# Altium PCB PCB1.PcbDoc (part 2 of 3)
Units mil, origin at the board's own origin, x right, y up, seen from the top; angles counter-clockwise.
Board outline 3937.01 x 3937.01 mil, 2 copper layers (Top Layer, Bottom Layer); 162 components, 129 nets, 526 pads, 166 vias.
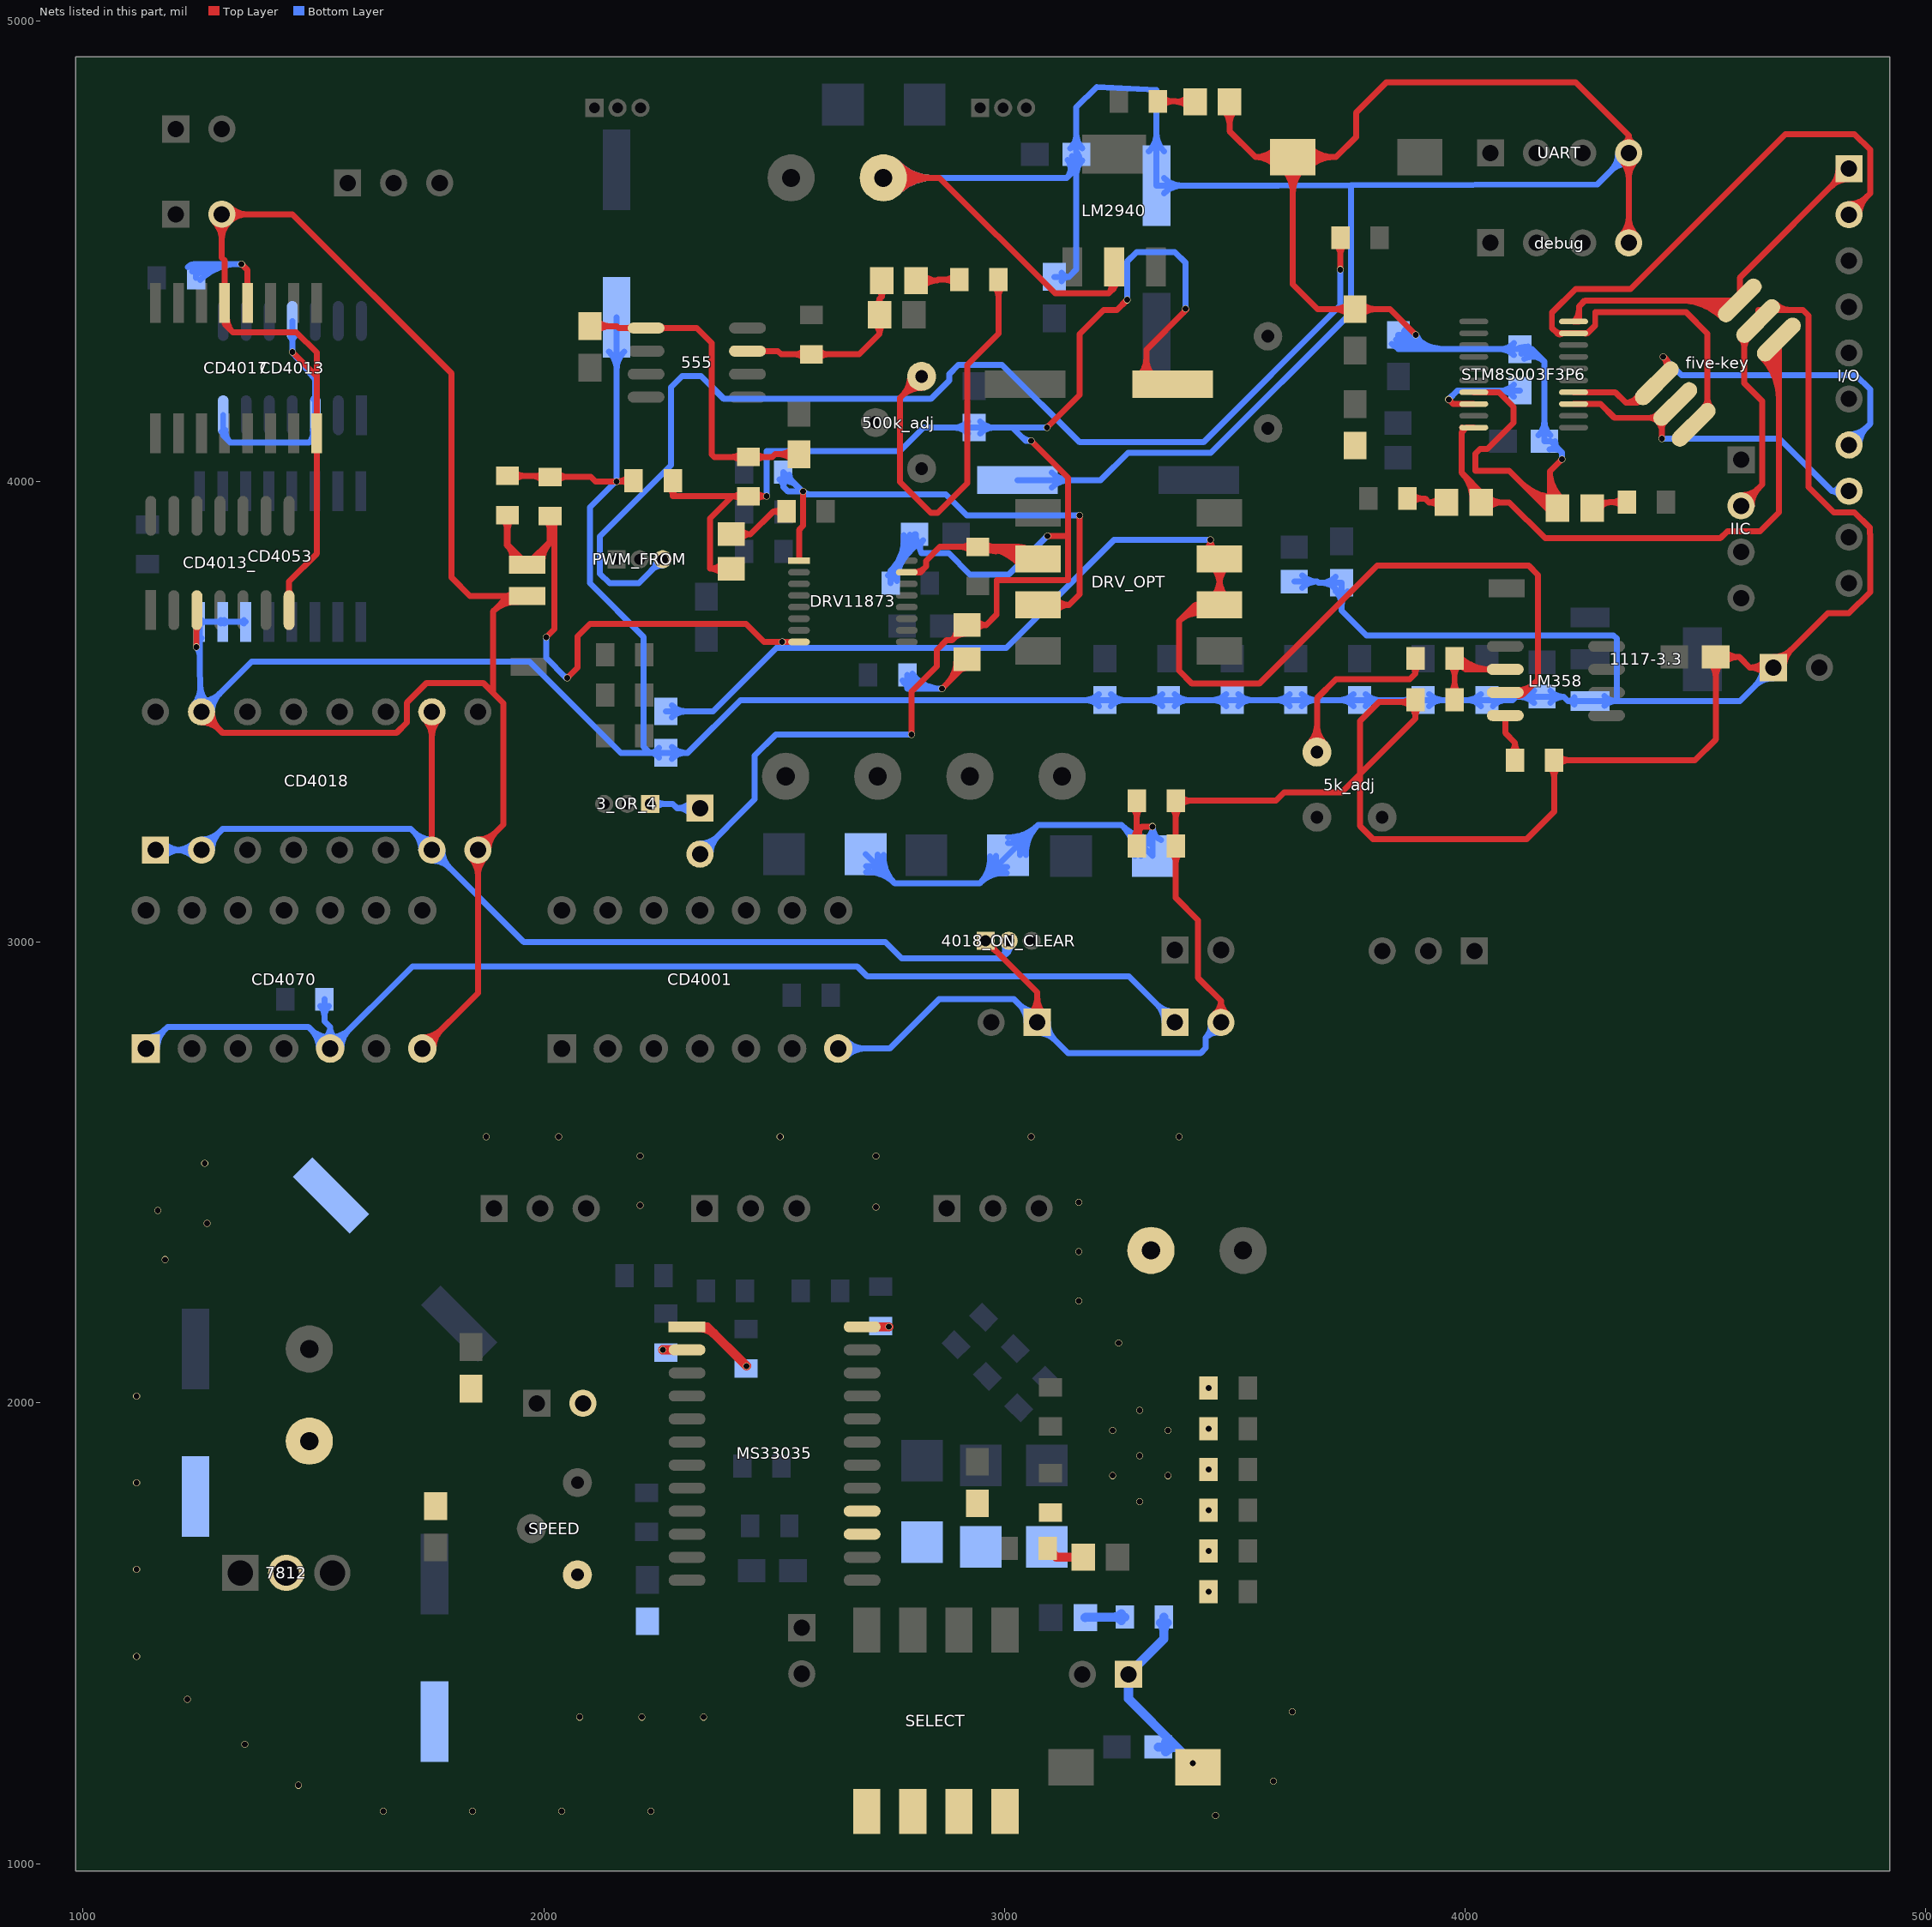
[diagram p2: the nets of this part, all layers, seen from the top]

## Via types
v1: diameter 15, hole 13, Top Layer to Bottom Layer, 166 vias

## Nets (pads, with @x,y where several pads share a name; then routed paths per layer and width w, separated by ;. In a path a pad name is that pad's centre, name@x,y a point inside that pad or via, vN(x,y) a via of type N, cw(c..) or ccw(c..) an arc to the next point about the centre after c; other vN are vias at no path point) (continued)
FR: 10k_3.1 DRV11873.15 DRV_OPT.2 | length 811.1
  Top Layer w13: DRV11873.15@2787.86,3802.8 2817.39,3802.8 2830,3815.41 2830,3828 2860,3858 10k_3.1@2942,3858 ; DRV11873.15@2804.39,3803.39 ccw(c2804.39,3836.19) 2827.58,3813 ; 10k_3.1@2927.45,3848.45 ccw(c2904.41,3825.41) 2904.41,3858 ccw(c2904.41,3890.59) 10k_3.1@2927.45,3867.55 ; 10k_3.1@2953.86,3846.37 cw(c2968.24,3821.97) 2975.32,3849.39 ; 10k_3.1@2956.55,3848.45 cw(c2979.59,3825.41) 2979.59,3858 cw(c2979.59,3890.59) 10k_3.1@2956.55,3867.55 ; 10k_3.1@2958.63,3864.86 ccw(c2990.38,3883.57) 2981.16,3847.88 ; 2971.56,3858 cw(c2971.56,3756.91) DRV_OPT.2@3046.07,3825.22 ; 3001.11,3858 cw(c3001.11,3784.01) DRV_OPT.2@3055.66,3834.01 ; DRV_OPT.2@3030.67,3858 cw(c3030.67,3811.1) DRV_OPT.2@3065.24,3842.79 ; DRV_OPT.2@3036.49,3816.44 ccw(c2942,3729.82) 10k_3.1@2942,3858 ; DRV_OPT.2@3073.15,3832 3030.43,3832 3030.43,3858 10k_3.1@2942,3858
FS: 10K.1 DRV11873.1 DRV_OPT.3 | length 1360
  Top Layer w13: DRV11873.1@2554,3828 2554,3895 2563,3904 v1(2563,3978) ; DRV_OPT.3@3073.15,3732 3140,3732 ; DRV_OPT.3@3110.99,3717.84 cw(c3140,3695.22) 3140,3732 ; DRV_OPT.3@3110.99,3746.16 ccw(c3140,3768.78) 3140,3732 ; v1(3163,3926) 3163,3755 3140,3732
  Bottom Layer w13: 10K.1@2511.83,4004.17 cw(c2499.86,3988.11) 2519.9,3988.11 ; 10K.1@2519.9,4001.5 cw(c2519.9,3956.84) 2551.48,3988.42 ; 10K.1@2527.96,4004.17 ccw(c2539.94,3988.11) 2519.9,3988.11 ; 10K.1@2533.4,4015 ccw(c2553.92,4015) 10K.1@2539.41,4000.49 ; v1(2563,3978) v1@2561.9,3978 ; v1@2563.71,3978.71 ccw(c2581.11,3996.11) 2581.11,3971.5 ; v1(3163,3926) 2918,3926 2872.5,3971.5 2568.4,3971.5 v1@2561.9,3978 ; 2519.9,3988.1 2530,3978 v1@2561.9,3978 ; 2519.9,3988.1 10K.1@2519.9,4020 v1@2561.9,3978
GND: 0.1R-.1 0.1R_3.1 0R_1.1 0R_2.1 0R_4.2 0R__.1 1K_4_-.2 1uf_.2 3.3V.1 10U_.2 20P_1.1 20P_2.1 22u_0.2 100uf.2 104--.1 104-.2 104_2.1 104_3.1 104_358.1 104_A.2 104_ad.1 104_B.2 104_C.2 104_D.2 104_E.2 104_F.2 104_G.2 105.2 1000UF.2 1117-3.3.1 4017_DIR.2 4018_DIR.2 4018_ON_CLEAR.1 4018_SHUT.1 CD4001.7 CD4013.3 CD4013.7 CD4013.11 CD4013_.3 CD4013_.7 CD4017.8 CD4017.13 CD4018.8 CD4018.15 CD4053.6 CD4053.7 CD4053.8 CD4070.7 debug.4 DIG_220UF.1 five-key.5 IIC.2 LM2940.2 POWER.2 POWER_IN.2 RST.1 stm8_power.2 STM8S003F3P6.7 text.1 UART.4 | length 32035.5
  Top Layer w13: v1(1246,3641) 1246,3698 1247,3699 CD4013_.3@1247,3720.64 ; 1246,3673.91 cw(c1262.24,3673.91) CD4013_.3@1250.76,3685.39 ; CD4018.15@1257,3476.97 cw(c1257,3421.38) 1296.31,3460.69 cw(c1335.62,3500) CD4018.15@1280.03,3500 ; CD4018.15@1257,3500 1303,3454 1680,3454 1703,3477 1703,3520 1745.81,3562.81 1868.13,3562.81 1890.13,3540.81 ; 4017_DIR.2@1284.72,4563.72 cw(c1245.41,4524.41) 1301,4524.41 cw(c1356.59,4524.41) 1317.28,4563.72 cw(c1356.59,4524.41) 1356.59,4580 cw(c1356.59,4635.59) 4017_DIR.2@1317.28,4596.28 ; CD4017.13@1303.24,4352.48 cw(c1294.18,4343.41) 1307,4343.41 cw(c1319.82,4343.41) CD4017.13@1310.76,4352.48 ; CD4017.13@1303.24,4422.98 ccw(c1294.18,4432.05) 1307,4432.05 ccw(c1319.82,4432.05) CD4017.13@1310.76,4422.98 ; CD4017.13@1312.31,4356.03 ccw(c1355.25,4354.39) 1324.86,4324 ; CD4013_.7@1443.24,3755.89 ccw(c1434.18,3764.96) 1447,3764.96 ccw(c1459.82,3764.96) CD4013_.7@1450.76,3755.89 ; CD4013_.7@1447,3720.64 1447,3783 1507,3843 CD4017.8@1507,4104.27 1507,4228 ; v1(1454,4281) 1507,4228 ; CD4017.8@1503.24,4069.02 cw(c1494.18,4059.95) 1507,4059.95 cw(c1519.82,4059.95) CD4017.8@1510.76,4069.02 ; CD4017.8@1503.24,4139.52 ccw(c1494.18,4148.59) 1507,4148.59 ccw(c1519.82,4148.59) CD4017.8@1510.76,4139.52 ; CD4070.7@1736.17,2769 1857,2889.83 CD4018.8@1857,3200 1912,3255 1912,3518.94 1890.13,3540.81 ; CD4070.7@1736.17,2793.5 ccw(c1736.17,2852.65) 1778,2810.82 ccw(c1819.82,2769) CD4070.7@1760.67,2769 ; CD4018.8@1840.72,3183.72 cw(c1801.41,3144.41) 1857,3144.41 cw(c1912.59,3144.41) CD4018.8@1873.28,3183.72 ; CD4018.8@1857,3223.03 ccw(c1857,3278.62) 1896.31,3239.31 ccw(c1935.62,3200) CD4018.8@1880.03,3200 ; 1910.16,3738.16 cw(c1941.02,3707.3) text.1@1944.3,3750.82 ; 0.1R_3.1@1921,4012 1983.5,4012 ; text.1@1934.99,3741.68 ccw(c1912.48,3719.17) 1912.48,3751 ccw(c1912.48,3782.83) text.1@1934.99,3760.32 ; 0.1R_3.1@1935.55,4002.45 cw(c1958.59,3979.41) 1958.59,4012 cw(c1958.59,4044.59) 0.1R_3.1@1935.55,4021.55 ; text.1@1943.32,3737.85 ccw(c1938.21,3670.06) 1890.13,3718.13 ; text.1@1964,3751 1923,3751 ; 1971.58,4012 cw(c1971.58,3972.58) 0.1R-.1@1999.45,4000.45 ; 1981.24,4012 ccw(c1981.24,4037.76) 0.1R-.1@1999.45,4019.55 ; 0.1R-.1@1997.02,4003.78 ccw(c1983.5,3996.78) 1983.5,4012 ; 0.1R-.1@1997.34,4003.2 ccw(c1985.5,3996.3) 1985.5,4010 ; 0.1R-.1@1997.34,4016.8 cw(c1985.5,4023.7) 1985.5,4010 ; 0.1R-.1@1998.88,4018.94 cw(c1983.5,4032.52) 1983.5,4012 ; 0.1R-.1@2028.55,4000.45 cw(c2051.59,3977.41) 2051.59,4010 cw(c2051.59,4042.59) 0.1R-.1@2028.55,4019.55 ; 2167.24,4000 cw(c2167.24,3974.24) 0R__.1@2185.45,3992.45 ; 0R__.1@2185.38,4011.47 cw(c2158,4038.41) v1(2158,4000) ; 0R__.1@2195,4002 2195,4000 v1(2158,4000) ; POWER_IN.2@2737,4659 2859,4659 3110,4408 3226,4408 ; POWER_IN.2@2759.4,4636.6 cw(c2813.48,4582.52) 2813.48,4659 cw(c2813.48,4735.48) POWER_IN.2@2759.4,4681.4 ; POWER_IN.2@2768.59,4627.41 cw(c2844.87,4551.13) 2844.87,4659 cw(c2844.87,4766.87) POWER_IN.2@2768.59,4690.59 ; 4018_ON_CLEAR.1@2959,2989.82 cw(c2959,2957.98) 2981.51,2980.49 cw(c3004.02,3003) 4018_ON_CLEAR.1@2972.18,3003 ; 4018_ON_CLEAR.1@2959,3003 3071,2891 4018_SHUT.1@3071,2826 ; 4018_SHUT.1@3054.72,2842.28 ccw(c3015.41,2881.59) 3071,2881.59 ccw(c3126.59,2881.59) 4018_SHUT.1@3087.28,2842.28 ; LM2940.2@3226.73,4435.11 cw(c3212.06,4421.94) 3226,4408 ; LM2940.2@3230.88,4431.86 cw(c3224.56,4420) 3238,4420 ; 3235.7,4417.7 ccw(c3222.28,4431.12) LM2940.2@3236.4,4443.8 ; LM2940.2@3238,4465.91 3238,4420 ; LM2940.2@3245.12,4431.86 ccw(c3251.44,4420) 3238,4420 ; 0R_1.1@3362.45,3194.45 cw(c3339.41,3171.41) 3372,3171.41 cw(c3404.59,3171.41) 0R_1.1@3381.55,3194.45 ; 0R_2.1@3362.45,3292.45 cw(c3339.41,3269.41) 3372,3269.41 cw(c3404.59,3269.41) 0R_2.1@3381.55,3292.45 ; 0R_2.1@3381.55,3297.45 cw(c3404.59,3274.41) 3404.59,3307 cw(c3404.59,3339.59) 0R_2.1@3381.55,3316.55 ; 4018_DIR.2@3456.03,2844.31 ccw(c3434.48,2872.54) 3470,2872.54 ; 4018_DIR.2@3470,2826 3470,2872.54 ; POWER.2@3474.9,4806.56 cw(c3442.31,4773.97) 3488.4,4773.97 cw(c3534.49,4773.97) POWER.2@3501.9,4806.56 ; 4018_DIR.2@3483.97,2844.31 cw(c3505.52,2872.54) 3470,2872.54 ; POWER.2@3488.4,4824 3488.4,4760 3544.4,4704 ; RST.1@3591.27,4682.53 ccw(c3544.41,4642.12) 3544.41,4704 ; RST.1@3591.27,4725.47 cw(c3544.41,4765.88) 3544.41,4704 ; RST.1@3601.11,4691.02 ccw(c3572.78,4666.6) 3572.78,4704 ccw(c3572.78,4741.4) RST.1@3601.11,4716.98 ; RST.1@3602.76,4680.76 cw(c3546.64,4624.64) 3626,4624.64 cw(c3705.36,4624.64) RST.1@3649.24,4680.76 ; RST.1@3611.95,4689.95 cw(c3578.03,4656.03) 3626,4656.03 cw(c3673.97,4656.03) RST.1@3640.05,4689.95 ; RST.1@3649.89,4689.95 cw(c3683.81,4656.03) 3683.81,4704 cw(c3683.81,4751.97) RST.1@3649.89,4718.05 ; RST.1@3659.09,4680.76 cw(c3715.2,4624.64) 3715.2,4704 cw(c3715.2,4783.36) RST.1@3659.09,4727.24 ; 20P_1.1@3747.92,4360.92 ccw(c3716.34,4329.34) 3716.34,4374 ccw(c3716.34,4418.66) 20P_1.1@3747.92,4387.08 ; 20P_2.1@3761,4078 20P_2.1@3761,4083 ; 20P_1.1@3774.08,4360.92 cw(c3805.66,4329.34) 3805.66,4374 cw(c3805.66,4418.66) 20P_1.1@3774.08,4387.08 ; 1K_4_-.2@3882.35,3530.55 cw(c3859.3,3553.59) 3859.3,3521 cw(c3859.3,3488.41) 3882.35,3511.45 cw(c3859.3,3488.41) 3891.9,3488.41 cw(c3924.49,3488.41) 1K_4_-.2@3901.44,3511.45 ; 1K_4_-.2@3891.9,3526 1K_4_-.2@3891.9,3521 ; v1(3893,4318) 3837,4374 20P_1.1@3761,4374 3680,4374 3626,4428 3626,4529 RST.1@3626,4704 ; STM8S003F3P6.7@4018.73,4193.61 4073.39,4193.61 4105,4162 4105,4127.44 4048.16,4070.6 4032.6,4070.6 4022,4060 4022,4023 4096,4023 4184,3935 4184,4022 ; 4121,3998 ccw(c4200.6,4077.59) stm8_power.2@4200.6,3965.03 ; 4143.2,3975.8 ccw(c4200.6,4033.21) stm8_power.2@4200.6,3952.03 ; 4165.39,3953.61 ccw(c4200.6,3988.82) stm8_power.2@4200.6,3939.03 ; 4173.98,3954 ccw(c4173.98,3972.56) stm8_power.2@4187.1,3959.44 ; stm8_power.2@4182.19,3940.89 ccw(c4165,3936.18) 4165,3954 stm8_power.2@4200.6,3954 ; 0R_4.2@4183.45,3380.45 cw(c4160.41,3357.41) 4193,3357.41 cw(c4225.59,3357.41) 0R_4.2@4202.55,3380.45 ; stm8_power.2@4184,3966.59 ccw(c4217.76,3966.59) stm8_power.2@4196.18,3940.62 ; 4184,3994.29 ccw(c4240.78,3994.29) stm8_power.2@4204.49,3950.62 ; 0R_4.2@4202.55,3385.45 cw(c4225.59,3362.41) 4225.59,3395 cw(c4225.59,3427.59) 0R_4.2@4202.55,3404.55 ; v1(4210.5,4048.5) 4184,4022 ; stm8_power.2@4212.8,3960.62 cw(c4263.8,4022) 4184,4022 ; debug.4@4338.72,4534.28 ccw(c4299.41,4573.59) 4355,4573.59 ccw(c4410.59,4573.59) debug.4@4371.28,4534.28 ; UART.4@4338.72,4696.72 cw(c4299.41,4657.41) 4355,4657.41 cw(c4410.59,4657.41) UART.4@4371.28,4696.72 ; UART.4@4344.34,4733.41 ccw(c4335.16,4751) 4355,4751 ; debug.4@4355,4518 UART.4@4355,4713 4355,4751 ; UART.4@4365.66,4733.41 cw(c4374.84,4751) 4355,4751 ; 104_358.1@4530.92,3605.92 cw(c4499.34,3574.34) 4544,3574.34 cw(c4588.66,3574.34) 104_358.1@4557.08,3605.92 ; 104_358.1@4562.08,3605.92 cw(c4593.66,3574.34) 4593.66,3619 cw(c4593.66,3663.66) 104_358.1@4562.08,3632.08 ; five-key.5@4598.17,4310.17 cw(c4579.02,4291.02) 4606.1,4291.02 cw(c4633.18,4291.02) five-key.5@4614.03,4310.17 ; IIC.2@4599,3947 4645,3993 4645,4174.33 4606.1,4213.23 4606.1,4318.1 five-key.5@4636,4348 4636,4372 4733,4372 4745,4360 4745,3988 4800,3933 4845,3933 4878,3900 4878,3886 4879,3885 4879,3760 4833,3714 4787,3714 3.3V.1@4669,3596 4618,3596 ; IIC.2@4599,3970.03 ccw(c4599,4025.62) 4638.31,3986.31 ccw(c4677.62,3947) IIC.2@4622.03,3947 ; 3.3V.1@4651.73,3580.77 ccw(c4618,3551.04) 4618,3596 ; 3.3V.1@4651.73,3611.23 cw(c4618,3640.96) 4618,3596 ; 3.3V.1@4669,3619.03 ccw(c4669,3674.62) 4708.31,3635.31 ccw(c4747.62,3596) 3.3V.1@4692.03,3596 ; five-key.5@4673.83,4385.83 ccw(c4707.22,4419.22) 4707.22,4372 ; 1324.86,4324 1307,4341.86 CD4017.13@1307,4387.73 1307,4480 1301,4486 4017_DIR.2@1301,4580 1454,4580 1800,4234 1800,3791 1840,3751 1923,3751 ; 1324.86,4324 1463,4324 1507,4280 1507,4228 ; 1890.13,3540.81 1890.13,3718.13 ; 1890.13,3718.13 1923,3751 ; 1923,3751 cw(c1923,3740.36) 1932.52,3745.11 ccw(c1923,3740.36) 1923,3751 ; 1923,3751 ccw(c1923,3761.64) 1932.52,3756.89 cw(c1923,3761.64) 1923,3751 ; 1983.5,4012 1985.5,4010 ; 1985.5,4010 0.1R-.1@2014,4010 2102,4010 2112,4000 v1(2158,4000) ; 3226,4408 3238,4420 ; 3470,2872.54 3420,2922.54 3420,3048 3372,3096 0R_1.1@3372,3209 0R_2.1@3372,3307 3589,3307 3607,3325 3732,3325 3772,3365 ; 3544.4,4704 RST.1@3626,4704 ; RST.1@3626,4704 3720,4704 3763,4747 3763,4800 3829,4866 4240,4866 4355,4751 ; 3772,3365 3891.9,3484.9 1K_4_-.2@3891.9,3521 ; 3772,3365 3772,3480 3813,3521 1K_4_-.2@3891.9,3521 ; 3772,3365 3772,3252 3800,3224 4134,3224 4193,3283 0R_4.2@4193,3395 4499,3395 4544,3440 104_358.1@4544,3619 4595,3619 4618,3596
  Bottom Layer w13: CD4018.15@1239.98,3515.51 ccw(c1198.89,3552.96) 1254.43,3555.53 ccw(c1309.96,3558.11) CD4018.15@1272.51,3517.02 ; v1@1245.29,3640.29 cw(c1226.69,3621.69) 1253,3621.69 ; v1@1245.29,3641.71 ccw(c1226.69,3660.31) CD4053.8@1253,3660.31 ; v1@1246,3639.95 cw(c1269.89,3639.95) CD4053.8@1256.07,3659.44 ; v1(1246,3641) 1246,3695.27 CD4053.8@1253,3695.27 ; CD4053.8@1249.24,3660.02 cw(c1240.18,3650.95) 1253,3650.95 cw(c1265.82,3650.95) CD4053.8@1256.76,3660.02 ; CD4053.8@1256.76,3691.51 cw(c1265.82,3682.45) 1265.82,3695.27 cw(c1265.82,3708.09) CD4053.8@1256.76,3699.02 ; CD4018.15@1257,3523.03 ccw(c1257,3578.62) 1296.31,3539.31 ccw(c1335.62,3500) CD4018.15@1280.03,3500 ; CD4053.7@1299.24,3691.51 ccw(c1290.18,3682.45) 1290.18,3695.27 ccw(c1290.18,3708.09) CD4053.7@1299.24,3699.02 ; CD4013.7@1300.4,4108.24 cw(c1292.78,4100) 1304,4100 ; CD4013.7@1304,4143.64 1304,4100 ; CD4053.7@1306.76,3691.51 cw(c1315.82,3682.45) 1315.82,3695.27 cw(c1315.82,3708.09) CD4053.7@1306.76,3699.02 ; CD4013.7@1307.6,4108.24 ccw(c1315.22,4100) 1304,4100 ; CD4013.7@1309.3,4111.77 ccw(c1344.33,4109.33) 1319.5,4084.5 ; CD4053.6@1349.24,3691.51 ccw(c1340.18,3682.45) 1340.18,3695.27 ccw(c1340.18,3708.09) CD4053.6@1349.24,3699.02 ; CD4053.6@1353,3695.27 CD4053.7@1303,3695.27 CD4053.8@1253,3695.27 ; CD4013.11@1450.24,4313.11 cw(c1441.18,4304.04) 1454,4304.04 cw(c1466.82,4304.04) CD4013.11@1457.76,4313.11 ; CD4013.11@1454,4348.36 v1(1454,4281) 1504,4221 CD4013.3@1504,4143.64 1504,4098 1490.5,4084.5 ; CD4013.3@1498.78,4111.17 cw(c1469.3,4105.7) 1490.5,4084.5 ; CD4013.3@1500.24,4108.39 cw(c1491.18,4099.32) 1504,4099.32 cw(c1516.82,4099.32) CD4013.3@1507.76,4108.39 ; CD4013.3@1500.24,4178.89 ccw(c1491.18,4187.96) 1504,4187.96 ccw(c1516.82,4187.96) CD4013.3@1507.76,4178.89 ; DIG_220UF.1@2141.38,4281.88 cw(c2101.27,4241.77) 2158,4241.77 cw(c2214.73,4241.77) DIG_220UF.1@2174.62,4281.88 ; v1@2156,4000 2100,3944 2100,3779 2217,3662 2217,3424 2230,3411 ; v1(2158,4000) DIG_220UF.1@2158,4356 ; 104_ad.1@2249.71,3400.58 ccw(c2230,3387.14) 2230,3411 ; 104_ad.1@2249.71,3421.42 cw(c2230,3434.86) 2230,3411 ; 104_ad.1@2278.08,3397.92 cw(c2309.66,3366.34) 2309.66,3411 cw(c2309.66,3455.66) 104_ad.1@2278.08,3424.08 ; CD4001.7@2639,2769 2751,2769 2858,2876 3021,2876 4018_SHUT.1@3071,2826 3138.03,2758.97 3426,2758.97 3437.03,2770 3437.03,2793.03 ; CD4001.7@2656.32,2751.68 cw(c2698.15,2709.85) 2698.15,2769 cw(c2698.15,2828.15) CD4001.7@2656.32,2786.32 ; POWER_IN.2@2737,4659 3135,4659 ; POWER_IN.2@2759.4,4636.6 cw(c2813.48,4582.52) 2813.48,4659 cw(c2813.48,4735.48) POWER_IN.2@2759.4,4681.4 ; POWER_IN.2@2768.59,4627.41 cw(c2844.87,4551.13) 2844.87,4659 cw(c2844.87,4766.87) POWER_IN.2@2768.59,4690.59 ; 1000UF.2@3028.15,4003 3209,4003 3268,4062 3448,4062 3752,4366 3752,4642.68 ; 4018_SHUT.1@3047.97,2826 ccw(c2992.38,2826) 3031.69,2865.31 ccw(c3071,2904.62) 4018_SHUT.1@3071,2849.03 ; 4018_SHUT.1@3071,2802.97 cw(c3071,2747.38) 3110.31,2786.69 cw(c3149.62,2826) 4018_SHUT.1@3094.03,2826 ; 1000UF.2@3102.27,3986.38 cw(c3142.38,3946.27) 3142.38,4003 cw(c3142.38,4059.73) 1000UF.2@3102.27,4019.62 ; 104_3.1@3108,4444 3140,4444 ; 104_3.1@3124.03,4434.77 cw(c3140,4425.58) 3140,4444 ; 104_3.1@3124.03,4453.23 ccw(c3140,4462.42) 3140,4444 ; 104_2.1@3136.78,4698.16 cw(c3114.44,4679.56) 3135,4659 ; 104_2.1@3142.92,4696.92 cw(c3111.34,4665.34) 3156,4665.34 cw(c3200.66,4665.34) 104_2.1@3169.08,4696.92 ; 104_2.1@3142.92,4723.08 ccw(c3111.34,4754.66) 3156,4754.66 ccw(c3200.66,4754.66) 104_2.1@3169.08,4723.08 ; 3145.07,4669.07 ccw(c3125.43,4688.71) 104_2.1@3146.77,4706.48 ; 3155.14,4679.14 ccw(c3136.42,4697.86) 104_2.1@3156.76,4714.8 ; 104_A.2@3204.92,3512.45 ccw(c3173.34,3480.86) 3173.34,3525.53 ccw(c3173.34,3570.19) 104_A.2@3204.92,3538.61 ; 104_A.2@3231.08,3512.45 cw(c3262.66,3480.86) 3262.66,3525.53 cw(c3262.66,3570.19) 104_A.2@3231.08,3538.61 ; 100uf.2@3313.38,4716.12 ccw(c3273.27,4756.23) 3330,4756.23 ccw(c3386.73,4756.23) 100uf.2@3346.62,4716.12 ; 104_B.2@3343.08,3512.45 ccw(c3311.5,3480.86) 3311.5,3525.53 ccw(c3311.5,3570.19) 104_B.2@3343.08,3538.61 ; 100uf.2@3346.62,4625.38 cw(c3386.73,4585.27) 3386.73,4642 cw(c3386.73,4698.73) 100uf.2@3346.62,4658.62 ; 104_B.2@3369.25,3512.45 cw(c3400.83,3480.86) 3400.83,3525.53 cw(c3400.83,3570.19) 104_B.2@3369.25,3538.61 ; 4018_DIR.2@3447.17,2822.97 cw(c3411.79,2818.27) 3437.03,2793.03 ; 4018_DIR.2@3466.97,2803.17 ccw(c3462.27,2767.79) 3437.03,2793.03 ; 4018_DIR.2@3470,2826 3437.03,2793.03 ; 104_C.2@3481.25,3512.45 ccw(c3449.67,3480.86) 3449.67,3525.53 ccw(c3449.67,3570.19) 104_C.2@3481.25,3538.61 ; 104_C.2@3507.42,3512.45 cw(c3539,3480.86) 3539,3525.53 cw(c3539,3570.19) 104_C.2@3507.42,3538.61 ; 104_D.2@3619.42,3512.45 ccw(c3587.84,3480.86) 3587.84,3525.53 ccw(c3587.84,3570.19) 104_D.2@3619.42,3538.61 ; 22u_0.2@3629,3782.6 3679,3782.6 ; 104_D.2@3645.58,3512.45 cw(c3677.16,3480.86) 3677.16,3525.53 cw(c3677.16,3570.19) 104_D.2@3645.58,3538.61 ; 22u_0.2@3646.44,3769.1 cw(c3679,3736.58) 3679,3782.6 ; 22u_0.2@3646.44,3796.09 ccw(c3679,3828.62) 3679,3782.6 ; 105.2@3718.92,3761.92 cw(c3687.34,3730.34) 3732,3730.34 cw(c3776.66,3730.34) 105.2@3745.08,3761.92 ; 105.2@3718.92,3766.92 ccw(c3687.34,3735.34) 3687.34,3780 ccw(c3687.34,3824.66) 105.2@3718.92,3793.08 ; 104_E.2@3757.58,3512.45 ccw(c3726,3480.86) 3726,3525.53 ccw(c3726,3570.19) 104_E.2@3757.58,3538.61 ; 104_E.2@3783.75,3512.45 cw(c3815.33,3480.86) 3815.33,3525.53 cw(c3815.33,3570.19) 104_E.2@3783.75,3538.61 ; 104--.1@3840.5,4298.5 ccw(c3868.28,4326.28) 3868.28,4287 ; 104--.1@3849.7,4307.7 ccw(c3899.66,4357.66) 3899.66,4287 ; 104--.1@3858.89,4316.89 ccw(c3931.05,4389.05) 3931.05,4287 ; 104--.1@3868.08,4326.08 ccw(c3962.43,4420.43) 3962.43,4287 ; 104--.1@3869.43,4324.96 ccw(c3887.35,4346.37) v1@3892.8,4318.98 ; 104--.1@3869.56,4306.59 cw(c3893,4288.23) v1(3893,4318) ; 104--.1@3869.56,4329.41 ccw(c3893,4347.77) v1(3893,4318) ; v1@3893.95,4318.32 ccw(c3926.47,4329.34) 3911.26,4298.55 ; 104_F.2@3895.75,3512.45 ccw(c3864.17,3480.86) 3864.17,3525.53 ccw(c3864.17,3570.19) 104_F.2@3895.75,3538.61 ; 104_F.2@3921.92,3512.45 cw(c3953.5,3480.86) 3953.5,3525.53 cw(c3953.5,3570.19) 104_F.2@3921.92,3538.61 ; 104_G.2@4033.92,3512.45 ccw(c4002.34,3480.86) 4002.34,3525.53 ccw(c4002.34,3570.19) 104_G.2@4033.92,3538.61 ; 104_G.2@4060.08,3512.45 cw(c4091.66,3480.86) 4091.66,3525.53 cw(c4091.66,3570.19) 104_G.2@4060.08,3538.61 ; 1uf_.2@4105.92,4273.92 ccw(c4074.34,4242.34) 4074.34,4287 ccw(c4074.34,4331.66) 1uf_.2@4105.92,4300.08 ; 1uf_.2@4115.29,4288.52 cw(c4128.7,4264.94) 4147.88,4284.12 ; 1uf_.2@4121.72,4277.22 cw(c4137.45,4249.57) 4159.94,4272.06 ; 1uf_.2@4128.15,4265.92 cw(c4146.19,4234.19) 4172,4260 ; 1uf_.2@4136.48,4280.94 cw(c4145,4277.98) 4145,4287 ; 1uf_.2@4136.48,4293.06 ccw(c4145,4296.02) 4145,4287 ; 10U_.2@4149.56,3519.1 ccw(c4116.97,3486.51) 4116.97,3532.6 ccw(c4116.97,3578.69) 10U_.2@4149.56,3546.1 ; 104-.2@4158.92,4100.08 ccw(c4127.34,4131.66) 4172,4131.66 ccw(c4216.66,4131.66) 104-.2@4185.08,4100.08 ; 104-.2@4182.82,4069.44 cw(c4191.19,4044.19) 4210,4063 ; 10U_.2@4185.08,3519.78 cw(c4214,3493.58) 4214,3532.6 ; 10U_.2@4185.08,3545.42 ccw(c4214,3571.62) 4214,3532.6 ; 104-.2@4195.5,4087 ccw(c4218.44,4087) 4202.22,4070.78 ; v1(4210.5,4048.5) 4210,4049 4210,4063 ; 1117-3.3.1@4237.32,3515.52 ccw(c4223.15,3506.82) 4223.15,3523.45 ; 1117-3.3.1@4237.32,3531.38 cw(c4223.15,3540.08) 4223.15,3523.45 ; 1117-3.3.1@4302.29,3512.73 cw(c4328.16,3486.86) 4328.16,3523.45 cw(c4328.16,3560.03) 1117-3.3.1@4302.29,3534.16 ; UART.4@4331.97,4713 cw(c4276.38,4713) 4315.69,4673.69 cw(c4355,4634.38) UART.4@4355,4689.97 ; UART.4@4355,4713 4287,4645 3752,4642.68 ; 3.3V.1@4645.97,3596 cw(c4590.38,3596) 4629.69,3556.69 cw(c4669,3517.38) 3.3V.1@4669,3572.97 ; 3.3V.1@4669,3596 4596.45,3523.45 4329,3523.45 ; CD4053.8@1253,3695.27 1253,3586.28 CD4018.15@1257,3500 1366,3609 1969,3609 2167,3411 2230,3411 ; 1304,4100 1319.5,4084.5 ; 1319.5,4084.5 1490.5,4084.5 ; 2230,3411 104_ad.1@2265,3411 2312,3411 2426.53,3525.53 104_A.2@3218,3525.53 104_B.2@3356.17,3525.53 104_C.2@3494.33,3525.53 104_D.2@3632.5,3525.53 104_E.2@3770.67,3525.53 104_F.2@3908.83,3525.53 104_G.2@4047,3525.53 4103,3525.53 4110.07,3532.6 10U_.2@4167,3532.6 4214,3532.6 ; 3135,4659 3156,4680 ; 3140,4444 3156,4460 3156,4680 ; 3156,4680 cw(c3171.07,4680) 3164.31,4693.47 ccw(c3171.07,4680) 3156,4680 ; 3156,4680 ccw(c3140.93,4680) 3147.69,4693.47 cw(c3140.93,4680) 3156,4680 ; 3156,4680 104_2.1@3156,4710 3156,4812 3200,4856 3330,4850 100uf.2@3330,4642 3595,4642 3752,4642.68 ; 3679,3782.6 3681.6,3780 105.2@3732,3780 3732,3720 3786,3666 4322,3666 4329,3659 4329,3523.45 ; 3855,4287 cw(c3864.02,4287) 3861.06,4295.52 ccw(c3864.02,4287) 3855,4287 ; 3855,4287 ccw(c3845.98,4287) 3848.94,4295.52 cw(c3845.98,4287) 3855,4287 ; 3855,4287 1uf_.2@4119,4287 4145,4287 ; 3855,4287 104--.1@3855,4318 v1(3893,4318) ; 4145,4287 4172,4260 ; 4172,4260 104-.2@4172,4087 4186,4087 4210,4063 ; 4214,3532.6 4223.15,3523.45 ; 4223.15,3523.45 1117-3.3.1@4270.91,3523.45 4329,3523.45
GND_DRV: 0R_5.2 0R__.2 2.2UF.1 3.3K.1 10uf.1 220UF.2 DRV.2 IS_COM_TOgnd.2 lock.2 | length 5354.2
  Top Layer w13: 0R__.2@2271.31,3986.67 cw(c2255.61,3968) 2280,3968 ; 0R__.2@2280,4002 2280,3968 ; 0R__.2@2288.69,3986.67 ccw(c2304.39,3968) 2280,3968 ; lock.2@2388.69,3798.03 ccw(c2361,3773.81) 2361,3810.6 ; lock.2@2388.69,3823.17 cw(c2361,3847.39) 2361,3810.6 ; lock.2@2407,3810.6 2361,3810.6 ; 0R_5.2@2428.9,3959.05 ccw(c2409,3941.42) 2409,3968 ; 0R_5.2@2428.9,3976.95 cw(c2409,3994.58) 2409,3968 ; 0R_5.2@2458.55,3958.45 cw(c2481.59,3935.41) 2481.59,3968 cw(c2481.59,4000.59) 0R_5.2@2458.55,3977.55 ; v1(2484,3968) 0R_5.2@2444,3968 2409,3968 ; v1(2798,3450.68) 2798,3543.57 2853.23,3598.8 2853.23,3634.23 2874,3655 2885.6,3655 ; 2889.19,3658.6 cw(c2915.06,3632.73) DRV.2@2915.06,3669.31 ; DRV.2@2896.13,3685.94 cw(c2859.43,3681.17) 2885.6,3655 ; DRV.2@2938.48,3677.32 cw(c2960,3661.97) 2960,3688.4 ; DRV.2@2938.48,3699.49 ccw(c2960,3714.83) 2960,3688.4 ; v1(3058,4088) 3138,4008 3138,3882 ; v1(3092,4117) 3163,4188 3163,4320 3215,4372 3244,4372 v1(3266,4394) ; v1(3093,3882) 3138,3882 ; 220UF.2@3290.88,4227.62 ccw(c3249.56,4268.94) 3308,4268.94 ; 3308,4266.53 ccw(c3363.03,4266.53) 220UF.2@3324.12,4227.62 ; 220UF.2@3365,4211 3308,4211 3308,4286 v1@3395,4373 ; 3388.46,4366.46 ccw(c3379.93,4375) v1@3392,4375 ; 2280,3968 2409,3968 ; 2361,3810.6 2361,3920 2409,3968 ; 2885.6,3655 DRV.2@2919,3688.4 2960,3688.4 ; 2960,3688.4 2983,3711.4 2983,3786 3138,3786 3138,3882
  Bottom Layer w13: IS_COM_TOgnd.2@2339,3191 2458,3310 2458,3405 2503.68,3450.68 v1(2798,3450.68) ; IS_COM_TOgnd.2@2339,3214.03 ccw(c2339,3269.62) 2378.31,3230.31 ccw(c2417.62,3191) IS_COM_TOgnd.2@2362.03,3191 ; v1(2484,3968) 2484,4066 2773,4066 2824,4117 10uf.1@2934,4117 3017,4117 ; 3.3K.1@2746.89,3796.04 ccw(c2741.83,3806) 2753,3806 ; 3.3K.1@2753,3779 2753,3806 ; 3.3K.1@2753.5,3784 cw(c2807.82,3784) 2769.41,3822.41 ; 3.3K.1@2759.11,3796.04 cw(c2764.17,3806) 2753,3806 ; 3.3K.1@2766.5,3784 cw(c2852.2,3784) 2791.6,3844.6 ; 2772.92,3825.92 ccw(c2720.19,3878.64) 2.2UF.1@2794.52,3884.56 ; 2.2UF.1@2781.56,3883.53 cw(c2683.31,3875.7) 2753,3806 ; 2792.83,3845.83 ccw(c2757.08,3881.58) 2.2UF.1@2807.48,3885.6 ; 2.2UF.1@2798.32,3867.75 cw(c2794.55,3858) 2805,3858 ; 2.2UF.1@2802.21,3868.22 cw(c2790.15,3842.25) 2817.04,3852.09 ; 2.2UF.1@2811.68,3867.75 ccw(c2815.45,3858) 2805,3858 ; 2818.09,3849.22 cw(c2838.4,3856.65) 2.2UF.1@2823.09,3871.93 ; 10uf.1@2920.92,4103.92 ccw(c2889.34,4072.34) 2889.34,4117 ccw(c2889.34,4161.66) 10uf.1@2920.92,4130.08 ; 10uf.1@2947.08,4103.92 cw(c2978.66,4072.34) 2978.66,4117 cw(c2978.66,4161.66) 10uf.1@2947.08,4130.08 ; 3035.81,4098.19 ccw(c3058,4120.38) v1@3058,4089 ; v1(3058,4088) 3046,4088 3017,4117 ; v1(3092,4117) 3017,4117 ; v1(3093,3882) 3009,3798 2925,3798 2879,3844 2820,3844 2.2UF.1@2805,3885 2805,3858 ; v1(3266,4394) 3266,4477 3287,4498 3370,4498 3393,4475 v1(3393,4375) ; 2753,3806 2805,3858
GND_MC: 0.05R/1W.2 33.1 103.2 104,,.2 104,-.1 104,.1 220UF,,.2 220UF,.2 1000UF,.2 5824,,,.1 5824,,.1 5824,.1 7812.2 ,,,,,,.2 ,,,,,.2 ,,,,.2 ,,,.2 ,,.2 MOS_GND.2 MS33035.15 MS33035.16 POWER_MC.1 REF_OUT.2 SELECT.5 SELECT.6 SELECT.7 SELECT.8 SPEED.3
  other v1: 3458,1104 1652,1114 1845.33,1114 2038.67,1114 2232,1114 1467,1170 3584,1179 1351,1259 2078,1318 2212.5,1318 2347,1318 3625,1330 1226,1357 1116,1450 3443,1590 1116,1638.33 3443,1678.4 3443,1766.8 3293,1786 1116,1826.67 3235,1842 3355,1842 3443,1855.2 3293,1885 3235,1940 3355,1940 3443,1943.6 3293,1984 1116,2015 3443,2032 3248,2130 3161,2221 1178,2311 3161,2328 1269,2390 1162,2418 2721,2425 2209,2429 3161,2435 1264,2520 2209,2536 2721,2536 1875,2578 2032,2578 2513,2578 3058,2578 3379,2578
GROUND_DRV: 0.1R-.2 0.1R_3.2 104_ad.2 DRV11873.8 DRV_OPT.6 DRV_OPT.7 LM358.3 text0.1 | length 5094.9
  Top Layer w13: v1(2005,3662) 2023,3680 2023,3925 0.1R-.2@2014,3925 ; 0.1R-.2@2009.45,3915.45 cw(c1976.75,3882.75) 2023,3882.75 ; 2023,3902.07 cw(c2041.93,3902.07) 0.1R-.2@2028.55,3915.45 ; v1(2051.09,3573.91) 2073,3595.81 2073,3664 2100,3691 2438.62,3691 2478,3651.62 v1(2517.62,3651.62) DRV11873.8@2554,3651.62 ; 3393.43,3711.43 cw(c3427.33,3677.53) DRV_OPT.6@3443.73,3722.58 ; 3407.86,3725.86 cw(c3435.03,3698.68) DRV_OPT.6@3448.18,3734.79 ; DRV_OPT.6@3425.59,3723.95 ccw(c3414,3719.63) 3414,3732 ; DRV_OPT.6@3425.59,3740.05 cw(c3414,3744.37) 3414,3732 ; DRV_OPT.7@3435.06,3851.59 ccw(c3421.84,3873) v1(3447,3873) ; DRV_OPT.6@3439.29,3710.36 ccw(c3419.63,3656.38) 3379,3697 ; DRV_OPT.6@3450.57,3748.28 ccw(c3411.26,3787.59) 3466.85,3787.59 ccw(c3522.44,3787.59) DRV_OPT.6@3483.13,3748.28 ; DRV_OPT.7@3450.57,3815.72 cw(c3411.26,3776.41) 3466.85,3776.41 cw(c3522.44,3776.41) DRV_OPT.7@3483.13,3815.72 ; DRV_OPT.7@3459.03,3851.74 cw(c3471.81,3873) v1(3447,3873) ; LM358.3@4087,3542 4130,3542 4158,3570 4158,3797 4138,3817 3809,3817 3553,3561 3407,3561 3379,3589 3379,3697 ; LM358.3@4115,3534.5 ccw(c4115,3552.61) 4127.8,3539.8 ; LM358.3@4115,3547.5 ccw(c4115,3596.99) 4150,3562 ; LM358.3@4118.89,3538.11 cw(c4128.28,3528.72) 4128.28,3542 cw(c4128.28,3555.28) LM358.3@4118.89,3545.89 ; 3379,3697 3414,3732 ; 3414,3732 DRV_OPT.6@3466.85,3732 DRV_OPT.7@3466.85,3832 3447,3832 v1(3447,3873)
  Top Layer w15: 0.1R_3.2@1912.16,3918.16 cw(c1890.82,3896.82) 1921,3896.82 cw(c1951.18,3896.82) 0.1R_3.2@1929.84,3918.16 ; 0.1R_3.2@1921,3927 1921,3862 ; text0.1@1932.45,3821.78 ccw(c1890.61,3831.61) 1921,3862 ; 1940.05,3842.95 cw(c1921.47,3824.36) text0.1@1947.06,3818.36 ; text0.1@1980.88,3818.79 cw(c2015.42,3821.43) 1990.92,3845.92 ; text0.1@1995.83,3819.93 cw(c2058.29,3824.71) 2014,3869 ; 0.1R-.2@2005.16,3916.16 cw(c1983.82,3894.82) 2014,3894.82 cw(c2044.18,3894.82) 0.1R-.2@2022.84,3916.16 ; 0.1R-.2@2014,3925 2014,3869 ; 1921,3862 text0.1@1964,3819 2014,3869
  Bottom Layer w13: v1(2005,3662) 2005,3617 2048.09,3573.91 v1(2051.09,3573.91) ; 2044.26,3577.74 ccw(c2051.09,3584.56) v1@2051.09,3574.91 ; 104_ad.2@2265,3501 2367,3501 2505,3639 ; 104_ad.2@2278.08,3487.92 cw(c2309.66,3456.34) 2309.66,3501 cw(c2309.66,3545.66) 104_ad.2@2278.08,3514.08 ; v1(2517.62,3651.62) 2505,3639 ; v1@2518.33,3652.33 ccw(c2550.51,3684.51) 2550.51,3639 ; v1(3447,3873) 3238,3873 3004,3639 2505,3639
KEY1: five-key.2 I/O.8 STM8S003F3P6.13 | length 869.7
  Top Layer w13: STM8S003F3P6.13@4235.27,4168.02 4294.13,4168.02 4324.16,4138 five-key.2@4427,4138 ; 4398.78,4138 ccw(c4398.78,4165.42) five-key.2@4418.17,4146.03 ; 4399.27,4138 cw(c4399.27,4111.27) 4418.17,4130.17 cw(c4396.85,4108.85) 4427,4108.85 ; v1(4427,4093) five-key.2@4427,4138 ; 4427,4113.19 cw(c4451.01,4113.19) five-key.2@4434.03,4130.17 ; five-key.2@4456,4168 five-key.2@4427,4138
  Bottom Layer w13: v1(4427,4093) 4682,4093 4796,3979 ; I/O.8@4812.34,3968.83 ccw(c4796,3960.79) 4796,3979 ; I/O.8@4812.34,3989.17 cw(c4796,3997.21) 4796,3979 ; I/O.8@4833,3979 4796,3979
KEY2: five-key.1 I/O.7 STM8S003F3P6.14 | length 1121.5
  Top Layer w13: STM8S003F3P6.14@4235.27,4193.61 4326,4193.61 4348.61,4171 ; 4369.51,4171 ccw(c4369.51,4191.28) five-key.1@4387.7,4182.31 ; five-key.1@4376.04,4188.06 cw(c4348.61,4201.57) 4348.61,4171 ; v1@4429.29,4270.29 cw(c4405.86,4246.86) five-key.1@4439,4246.86 ; v1@4429.76,4270.03 cw(c4426.9,4258.27) five-key.1@4439,4258.27 ; five-key.1@4435.36,4246.75 ccw(c4413.67,4254.67) v1(4430,4271) 4439,4262 ; five-key.1@4446.49,4254.1 cw(c4446.91,4262) 4439,4262 ; 4348.61,4171 4374,4171 five-key.1@4416,4213 4439,4236 4439,4262
  Bottom Layer w13: v1(4430,4271) 4470,4231 4848,4231 4879,4200 4879,4125 I/O.7@4833,4079 ; I/O.7@4833,4102.03 ccw(c4833,4157.62) 4872.31,4118.31 ccw(c4911.62,4079) I/O.7@4856.03,4079
KEY3: five-key.3 I/O.2 STM8S003F3P6.19 | length 1832.1
  Top Layer w13: 4194.17,4327.39 ccw(c4209.68,4342.9) STM8S003F3P6.19@4209.68,4320.97 ; STM8S003F3P6.19@4210.06,4321.11 cw(c4205.28,4326.84) 4200,4321.57 ; STM8S003F3P6.19@4260.86,4320.97 ccw(c4260.86,4330.9) 4267.88,4323.88 ; five-key.3@4496,4123 4526,4153 4526,4321 4480,4367 4282.26,4367 4282.26,4338.26 4265.57,4321.57 STM8S003F3P6.19@4235.27,4321.57 4200,4321.57 ; five-key.3@4517.97,4160.83 ccw(c4498.58,4180.22) 4526,4180.22 ; 4526,4179.73 ccw(c4552.73,4179.73) five-key.3@4533.83,4160.83 ; I/O.2@4833,4579 4879,4625 4879,4720 4845,4754 4695,4754 4359,4418 4240,4418 4188.27,4366.27 4188.27,4333.29 4200,4321.57 ; I/O.2@4833,4602.03 ccw(c4833,4657.62) 4872.31,4618.31 ccw(c4911.62,4579) I/O.2@4856.03,4579
KEY4: five-key.4 I/O.1 STM8S003F3P6.20 | length 1161.5
  Top Layer w13: STM8S003F3P6.20@4235.27,4347.16 4247,4347.16 4247,4380 4260,4393 five-key.4@4596,4393 4596,4442 I/O.1@4833,4679 ; STM8S003F3P6.20@4235.69,4346.74 ccw(c4208.38,4374.05) 4247,4374.05 ; 4466.84,4393 cw(c4466.84,4263.84) five-key.4@4558.17,4355.17 ; 4498.22,4393 cw(c4498.22,4295.22) five-key.4@4567.36,4364.36 ; 4529.61,4393 cw(c4529.61,4326.61) five-key.4@4576.55,4373.55 ; 4560.99,4393 cw(c4560.99,4357.99) five-key.4@4585.75,4382.75 ; five-key.4@4592.38,4393 cw(c4592.38,4389.38) five-key.4@4594.94,4391.94 ; I/O.1@4809.97,4679 cw(c4754.38,4679) 4793.69,4639.69 cw(c4833,4600.38) I/O.1@4833,4655.97
KEY5: five-key.6 PA3.2 STM8S003F3P6.10 | length 1731.7
  Top Layer w13: STM8S003F3P6.10@3993.67,4117.12 cw(c3985.31,4112.69) 3992,4106 ; 4012.97,3998.03 cw(c3975.81,3960.87) PA3.2@4028.32,3958.71 ; PA3.2@4015.33,3959.25 ccw(c3935.53,3962.52) 3992,4019 ; STM8S003F3P6.10@4018.73,4116.84 4002.84,4116.84 3992,4106 ; PA3.2@4047.9,3941.03 cw(c4080.49,3908.44) 4080.49,3954.53 cw(c4080.49,4000.62) PA3.2@4047.9,3968.03 ; five-key.6@4643.17,4270.17 cw(c4551.84,4178.84) 4681,4178.84 ; five-key.6@4652.36,4279.36 cw(c4583.22,4210.22) 4681,4210.22 ; five-key.6@4661.55,4288.55 cw(c4614.61,4241.61) 4681,4241.61 ; five-key.6@4670.75,4297.75 cw(c4645.99,4272.99) 4681,4272.99 ; five-key.6@4679.94,4306.94 cw(c4677.38,4304.38) five-key.6@4681,4304.38 ; five-key.6@4681,4308 4681,3933.03 4640,3892.03 4569.03,3892.03 4554,3877 4173.53,3877 4096,3954.53 PA3.2@4034.4,3954.53 4034.4,3976.6 3992,4019 ; 3992,4019 3992,4106
LD: 4018_ON_CLEAR.2 CD4018.1 CD4018.2 CD4018.7 CD4018.10 | length 2930.9
  Top Layer w13: CD4018.10@1740.72,3483.72 cw(c1701.41,3444.41) 1757,3444.41 cw(c1812.59,3444.41) CD4018.10@1773.28,3483.72 ; CD4018.7@1757,3200 CD4018.10@1757,3500
  Bottom Layer w13: CD4018.1@1157,3200 CD4018.2@1257,3200 1303,3246 1711,3246 CD4018.7@1757,3200 1956.5,3000.5 2741.5,3000.5 2777,2965 2994,2965 ; CD4018.1@1173.28,3183.72 cw(c1212.59,3144.41) 1212.59,3200 cw(c1212.59,3255.59) CD4018.1@1173.28,3216.28 ; CD4018.2@1240.72,3183.72 ccw(c1201.41,3144.41) 1201.41,3200 ccw(c1201.41,3255.59) CD4018.2@1240.72,3216.28 ; CD4018.2@1257,3223.03 ccw(c1257,3278.62) 1296.31,3239.31 ccw(c1335.62,3200) CD4018.2@1280.03,3200 ; CD4018.7@1733.97,3200 ccw(c1678.38,3200) 1717.69,3239.31 ccw(c1757,3278.62) CD4018.7@1757,3223.03 ; CD4018.7@1757,3176.97 cw(c1757,3121.38) 1796.31,3160.69 cw(c1835.62,3200) CD4018.7@1780.03,3200 ; 4018_ON_CLEAR.2@2997.74,2996.15 cw(c2976.05,2982.95) 2994,2965 ; 4018_ON_CLEAR.2@3002.34,2991.62 cw(c2995.53,2980) 3009,2980 ; 3005.7,2976.7 ccw(c2990.6,2991.8) 4018_ON_CLEAR.2@3008.84,3002.9 ; 4018_ON_CLEAR.2@3009,3003 3009,2980 ; 4018_ON_CLEAR.2@3015.66,2991.62 ccw(c3022.47,2980) 3009,2980 ; 2994,2965 3009,2980
MCU_PWM: 120R.2 PWM_FROM.3 | length 2598
  Top Layer w13: 120R.2@3719.45,4514.45 cw(c3696.41,4491.41) 3729,4491.41 cw(c3761.59,4491.41) 120R.2@3738.55,4514.45 ; v1(3729,4460) 120R.2@3729,4529
  Bottom Layer w13: PWM_FROM.3@2244.82,3831 cw(c2212.98,3831) 2235.49,3808.49 cw(c2258,3785.98) PWM_FROM.3@2258,3817.82 ; PWM_FROM.3@2258,3831 2206,3779 2143,3779 2122,3800 2122,3881 2276,4035 2276,4204.78 2300,4228.78 2341.22,4228.78 2391,4179 2840,4179 2880,4219 2880,4233 2900,4253 2995,4253 3163,4085 3432,4085 3729,4382 v1(3729,4460)
Net0R_1_2: 0R_1.2 0R_2.2 5824.1 5824_1.1 5824_2.1 | length 2074.8
  Top Layer w13: 0R_2.2@3277.45,3292.45 cw(c3254.41,3269.41) 3287,3269.41 cw(c3319.59,3269.41) 0R_2.2@3296.55,3292.45 ; 0R_1.2@3279.23,3225.04 ccw(c3268.72,3240) 3287,3240 ; 0R_1.2@3287,3209 3287,3240 ; 0R_2.2@3287,3307 3287,3240 ; 0R_1.2@3287.37,3214.33 cw(c3302.1,3227.33) 3288.21,3241.21 ; 0R_1.2@3294.77,3225.04 cw(c3305.28,3240) 3287,3240 ; 0R_1.2@3297.12,3222.93 cw(c3312.5,3236.5) 3298,3251 ; v1(3321.58,3251) 3298,3251 ; 3287,3240 3298,3251
  Bottom Layer w13: 5824_2.1@2698.58,3191 2761.58,3128 ; 5824_2.1@2699.5,3165.24 cw(c2701.46,3110.13) 2740.46,3149.12 cw(c2779.45,3188.12) 5824_2.1@2724.34,3190.08 ; 5824_2.1@2699.96,3152.25 cw(c2702.92,3069.34) 2761.58,3128 ; 5824_2.1@2737.33,3189.62 ccw(c2820.24,3186.66) 2761.58,3128 ; 5824_1.1@2968.87,3186.69 cw(c2892.44,3182.14) 2946.58,3128 ; 5824_1.1@2981.85,3187.47 cw(c2931.05,3184.44) 2967.03,3148.45 cw(c3003.02,3112.46) 5824_1.1@3006.05,3163.27 ; 5824_1.1@3005.28,3150.29 ccw(c3000.73,3073.86) 2946.58,3128 ; 5824_1.1@3007.92,3214.77 ccw(c3008.69,3274.3) 3050.79,3232.21 ccw(c3092.89,3190.11) 5824_1.1@3033.36,3189.33 ; 5824_1.1@3008.09,3227.77 ccw(c3009.25,3317.33) 3072.58,3254 ; 5824_1.1@3046.35,3189.5 cw(c3135.91,3190.67) 3072.58,3254 ; 5824.1@3282.81,3187 ccw(c3189.19,3187) 3255.39,3253.19 ccw(c3321.58,3319.39) 5824.1@3321.58,3225.78 ; 5824.1@3295.81,3187 ccw(c3233.58,3187) 3277.58,3231 ccw(c3321.58,3275) 5824.1@3321.58,3212.78 ; 5824.1@3303.63,3221.37 ccw(c3288.16,3251) v1(3321.58,3251) ; 5824.1@3339.53,3221.37 cw(c3355.01,3251) v1(3321.58,3251) ; 2761.58,3128 2946.58,3128 ; 2946.58,3128 5824_1.1@3007.58,3189 3072.58,3254 ; 3072.58,3254 3254.58,3254 5824.1@3321.58,3187 v1(3321.58,3251)
Net0R_4_1: 0R_4.1 LM358.4 | length 177.8
  Top Layer w13: LM358.4@4083.11,3488.11 cw(c4073.72,3478.72) 4087,3478.72 cw(c4100.28,3478.72) LM358.4@4090.89,3488.11 ; LM358.4@4087,3492 4087,3454 4108,3433 0R_4.1@4108,3395 ; 0R_4.1@4098.45,3409.55 ccw(c4075.41,3432.59) 4108,3432.59 ccw(c4140.59,3432.59) 0R_4.1@4117.55,3409.55
Net0R_5_1: 0R_5.1 100p.1 104_555.1 555.1 | length 1000.3
  Top Layer w13: 100p.1@2100,4337 2159,4337 2163,4333 555.1@2222,4333 2332,4333 2364.5,4300.5 2364.5,4058.5 2370,4053 0R_5.1@2444,4053 2496,4053 2502,4059 104_555.1@2554,4059 ; 100p.1@2113.08,4323.92 cw(c2144.66,4292.34) 2144.66,4337 cw(c2144.66,4381.66) 100p.1@2113.08,4350.08 ; 555.1@2190.11,4329.11 ccw(c2180.72,4319.72) 2180.72,4333 ccw(c2180.72,4346.28) 555.1@2190.11,4336.89 ; 555.1@2253.89,4329.11 cw(c2263.28,4319.72) 2263.28,4333 cw(c2263.28,4346.28) 555.1@2253.89,4336.89 ; 0R_5.1@2429.45,4043.45 ccw(c2406.41,4020.41) 2406.41,4053 ccw(c2406.41,4085.59) 0R_5.1@2429.45,4062.55 ; 0R_5.1@2458.55,4043.45 cw(c2481.59,4020.41) 2481.59,4053 cw(c2481.59,4085.59) 0R_5.1@2458.55,4062.55 ; 104_555.1@2540.92,4045.92 ccw(c2509.34,4014.34) 2509.34,4059 ccw(c2509.34,4103.66) 104_555.1@2540.92,4072.08
Net1K,,,_2: 1K,,,.2 MS33035.24 | length 58
  Top Layer w20: MS33035.24@2691,2165 v1(2749,2165)
Net1K,,_2: 1K,,.2 MS33035.1 | length 198.3
  Top Layer w20: MS33035.1@2311,2165 2355,2165 v1(2440,2080) ; MS33035.1@2339,2163 cw(c2339,2119.54) 2369.73,2150.27
Net1K,_2: 1K,.2 MS33035.2 | length 53
  Top Layer w20: v1(2258,2115) MS33035.2@2311,2115
Net1K_1_1: 1K_1.1 lock.1 | length 234.4
  Top Layer w13: lock.1@2407,3885.4 2448.5,3885.4 ; lock.1@2426.36,3874.15 cw(c2448.5,3858) 2448.5,3885.4 ; lock.1@2426.36,3896.65 ccw(c2448.5,3912.81) 2448.5,3885.4 ; 1K_1.1@2516.65,3926.34 ccw(c2498.1,3910.81) 2498.1,3935 ; 1K_1.1@2516.65,3943.66 cw(c2498.1,3959.19) 2498.1,3935 ; 1K_1.1@2527,3935 2498.1,3935 ; 2448.5,3885.4 2498.1,3935
Net1K_2_1: 1K_2.1 POWER.1 | length 191.3
  Top Layer w13: 1K_2.1@3333,4825 3372,4825 3373,4824 ; 1K_2.1@3342.55,4815.45 cw(c3365.59,4792.41) 3365.59,4825 cw(c3365.59,4857.59) 1K_2.1@3342.55,4834.55 ; POWER.1@3398.89,4811.82 ccw(c3373,4790.38) 3373,4824 ; POWER.1@3398.89,4836.18 cw(c3373,4857.62) 3373,4824 ; POWER.1@3413.6,4824 3373,4824
Net1K_3_1: 1K_3.1 DRV.1 | length 536.6
  Top Layer w13: v1(2864,3550) 2919,3605 DRV.1@2919,3613.6 ; 2873.61,3559.61 ccw(c2819.62,3613.6) DRV.1@2895.97,3613.6 ; 2895.8,3581.8 ccw(c2864.01,3613.6) DRV.1@2908.97,3613.6 ; DRV.1@2903.87,3589.87 cw(c2915.06,3578.68) DRV.1@2915.06,3594.51
  Bottom Layer w13: 1K_3.1@2778.84,3567.71 ccw(c2813.35,3592.47) 2813.35,3550 ; 1K_3.1@2789,3580 2789,3550 ; 1K_3.1@2789.41,3575.29 ccw(c2838.67,3610.63) 2838.67,3550 ; 1K_3.1@2799.97,3582.87 ccw(c2864,3628.8) v1(2864,3550) 2789,3550 ; 2789,3550 cw(c2805.4,3550) 2796.4,3563.71 ccw(c2805.4,3550) 2789,3550 ; 2789,3550 ccw(c2772.6,3550) 2781.6,3563.71 cw(c2772.6,3550) 2789,3550
Net1K_4_1: 1K_4.1 stm8_power.1 | length 166.2
  Top Layer w13: stm8_power.1@4275.4,3954 4312,3954 ; stm8_power.1@4288.9,3959.44 ccw(c4302.02,3972.56) 4302.02,3954 ; stm8_power.1@4293.67,3940.4 cw(c4312,3934.85) 4312,3954 ; 1K_4.1@4341.45,3945.45 ccw(c4318.41,3922.41) 4318.41,3955 ccw(c4318.41,3987.59) 1K_4.1@4341.45,3964.55 ; 1K_4.1@4351,3955 4313,3955 4312,3954
Net1K_4_-_1: 1K_4_-.1 18K.2 LM358.2 | length 552.6
  Top Layer w13: 1K_4_-.1@3967.35,3540.55 ccw(c3944.05,3563.84) 3977,3563.84 ; 18K.2@3967.45,3601.45 cw(c3944.41,3578.41) 3977,3578.41 cw(c4009.59,3578.41) 18K.2@3986.55,3601.45 ; 1K_4_-.1@3970.54,3542.91 ccw(c3964.9,3553.5) 3976.9,3553.5 ; 1K_4_-.1@3970.58,3542.93 ccw(c3964.92,3553.6) 3977,3553.6 ; 1K_4_-.1@3976.9,3526 3976.9,3553.5 ; 3977,3563.34 ccw(c4009.24,3563.34) 1K_4_-.1@3986.44,3540.55 ; 18K.2@3977.35,3611.35 ccw(c4024.08,3658.08) 4024.08,3592 ; 18K.2@3980.16,3597.87 cw(c3985.34,3576.34) 4001,3592 ; 1K_4_-.1@3983.25,3542.91 cw(c3988.89,3553.5) 3976.9,3553.5 ; 1K_4_-.1@3983.38,3542.84 cw(c3989.27,3553.6) 3977,3553.6 ; 18K.2@3986.55,3620.55 ccw(c4055.46,3689.46) LM358.2@4055.46,3592 ; 18K.2@3990.5,3611 ccw(c4011.02,3611) 18K.2@3996.51,3596.49 ; LM358.2@4055.11,3588.11 ccw(c4045.72,3578.72) 4045.72,3592 ccw(c4045.72,3605.28) LM358.2@4055.11,3595.89 ; LM358.2@4087,3592 4001,3592 ; 3976.9,3553.5 3977,3553.6 ; 3977,3553.6 18K.2@3977,3616 4001,3592
Net1K_5_1: 1K_5.1 PA3.1 | length 192.3
  Top Layer w13: 1K_5.1@3875,3963 3913,3963 3921.47,3954.53 ; 1K_5.1@3884.55,3953.45 cw(c3907.59,3930.41) 3907.59,3963 cw(c3907.59,3995.59) 1K_5.1@3884.55,3972.55 ; PA3.1@3944.31,3943.09 ccw(c3921.47,3926.01) 3921.47,3954.53 ; PA3.1@3944.31,3965.96 cw(c3921.47,3983.05) 3921.47,3954.53 ; PA3.1@3959.6,3954.53 3921.47,3954.53
Net1K_5___1: 1K_5__.1 555.7 5817_0.1 5817_1.2 | length 668.5
  Top Layer w13: 555.7@2442,4283 2508,4283 2515,4276 1K_5__.1@2581,4276 2684.6,4276 2728.6,4320 ; 555.7@2473.89,4279.11 cw(c2483.28,4269.72) 2483.28,4283 cw(c2483.28,4296.28) 555.7@2473.89,4286.89 ; 1K_5__.1@2566.45,4266.45 ccw(c2543.41,4243.41) 2543.41,4276 ccw(c2543.41,4308.59) 1K_5__.1@2566.45,4285.55 ; 1K_5__.1@2595.55,4266.45 cw(c2618.59,4243.41) 2618.59,4276 cw(c2618.59,4308.59) 1K_5__.1@2595.55,4285.55 ; 5817_0.1@2717.18,4342.76 cw(c2700.2,4320) 2728.6,4320 ; 5817_0.1@2720.48,4383.22 ccw(c2714.47,4396) 2728.6,4396 ; 5817_1.2@2724.98,4415.03 cw(c2717.87,4401) 2733.6,4401 ; 5817_1.2@2733.6,4436 2733.6,4401 ; 5817_0.1@2736.72,4383.22 cw(c2742.72,4396) 2728.6,4396 ; 5817_0.1@2740.01,4342.76 ccw(c2756.99,4320) 2728.6,4320 ; 5817_1.2@2742.22,4415.03 ccw(c2749.32,4401) 2733.6,4401 ; 2728.6,4320 5817_0.1@2728.6,4362 2728.6,4396 ; 2728.6,4396 2733.6,4401
Net1K_6_1: 1K_6.1 5817_1.1 | length 216.8
  Top Layer w13: 5817_1.1@2808.4,4436 2854,4436 ; 5817_1.1@2822,4422.6 cw(c2854,4391.09) 2854,4436 ; 5817_1.1@2822,4449.4 ccw(c2854,4480.91) 2854,4436 ; 1K_6.1@2892.45,4428.45 ccw(c2869.41,4405.41) 2869.41,4438 ccw(c2869.41,4470.59) 1K_6.1@2892.45,4447.55 ; 1K_6.1@2902,4438 2856,4438 2854,4436
Net1K_6_2: 1K_6.2 500k_adj.1 | length 1064.9
  Top Layer w13: 500k_adj.1@2795,4228 cw(c2734.66,4228) 2777.33,4185.33 cw(c2820,4142.66) 500k_adj.1@2820,4203 ; 500k_adj.1@2820,4228 2773,4181 2773,3999 2840,3932 2855,3932 2919,3996 2919,4253 2987,4321 1K_6.2@2987,4438 ; 1K_6.2@2977.45,4423.45 cw(c2954.41,4400.41) 2987,4400.41 cw(c3019.59,4400.41) 1K_6.2@2996.55,4423.45
Net1uf__1: 1uf_.1 STM8S003F3P6.8 | length 291.9
  Top Layer w13: v1(3964,4178) 3973.98,4168.02 STM8S003F3P6.8@4018.73,4168.02
  Bottom Layer w13: v1(3964,4178) 3983,4197 1uf_.1@4119,4197 ; 1uf_.1@4105.92,4183.92 ccw(c4074.34,4152.34) 4074.34,4197 ccw(c4074.34,4241.66) 1uf_.1@4105.92,4210.08
Net2.2K,_1: 2.2K,.1 5817_1,.1 | length 123.9
  Bottom Layer w20: 3175.4,1534 3176.4,1535 3261,1535 ; 3253.93,1527.93 ccw(c3236.86,1510.86) 3236.86,1535 ccw(c3236.86,1559.14) 3253.93,1542.07
Net2.2K,_2: 2.2K,.2 47UF.2 RESET.1 锁存.1 | length 538.8
  Bottom Layer w20: 47UF.2@3334,1253 3374,1253 ; 3338.93,1522.93 cw(c3321.86,1505.86) 3346,1505.86 cw(c3370.14,1505.86) 3353.07,1522.93 ; 3346,1535 3346,1488 锁存.1@3269,1411 3269,1358 3374,1253 ; 47UF.2@3349.86,1242.66 cw(c3374,1219.67) 3374,1253 ; 47UF.2@3349.86,1263.34 ccw(c3374,1286.33) 3374,1253 ; v1(3409,1218) 3374,1253
Net2.2K_2: 2.2K.2 Fault.1 | length 84.5
  Top Layer w20: 2.2K.2@3094,1684 3113,1665 Fault.1@3170.6,1665
Net3_OR_4_1: 3_OR_4.1 IS_COM_TOgnd.1 | length 235.6
  Bottom Layer w13: 3_OR_4.1@2231,3300 2280,3300 2289,3291 ; 3_OR_4.1@2240.32,3290.68 cw(c2262.83,3268.17) 2262.83,3300 cw(c2262.83,3331.83) 3_OR_4.1@2240.32,3309.32 ; IS_COM_TOgnd.1@2321.5,3276.03 ccw(c2289,3248.24) 2289,3291 ; IS_COM_TOgnd.1@2321.5,3305.97 cw(c2289,3333.76) 2289,3291 ; IS_COM_TOgnd.1@2339,3291 2289,3291
Net5k_adj_1: 5k_adj.1 18K.1 | length 520.4
  Top Layer w13: 5k_adj.1@3660.59,3430.34 ccw(c3617.92,3473.01) 3678.27,3473.01 ccw(c3738.61,3473.01) 5k_adj.1@3695.94,3430.34 ; 5k_adj.1@3678.27,3412.67 3678.27,3529.27 3720,3571 3880,3571 3892,3583 ; 18K.1@3883.59,3600.44 cw(c3869.72,3583) 3892,3583 ; 18K.1@3892,3616 3892,3583 ; 18K.1@3900.41,3600.44 ccw(c3914.28,3583) 3892,3583
Net10k_0_1: 10k_0.1 CD4017.12 | length 493.9
  Top Layer w13: v1(1344,4472) 1357,4459 CD4017.12@1357,4387.73 ; CD4017.12@1353.24,4422.98 ccw(c1344.18,4432.05) 1357,4432.05 ccw(c1369.82,4432.05) CD4017.12@1360.76,4422.98
  Bottom Layer w13: 10k_0.1@1226.97,4465.03 cw(c1243.79,4448.21) 1243.79,4472 ; 10k_0.1@1236.16,4455.84 cw(c1275.18,4416.82) 1275.18,4472 ; 10k_0.1@1237.6,4458.29 ccw(c1228.6,4472) 1245,4472 ; 10k_0.1@1245,4442 1245,4472 ; 10k_0.1@1245.35,4446.65 cw(c1306.56,4385.44) 1306.56,4472 ; 10k_0.1@1252.4,4458.29 cw(c1261.4,4472) 1245,4472 ; 10k_0.1@1254.55,4437.45 cw(c1337.95,4354.05) v1@1337.95,4472 ; v1(1344,4472) 1245,4472
Net10k_2__1: 10k_2_.1 4018_DIR.1 CD4070.1 CD4070.5 | length 2989.4
  Bottom Layer w13: CD4070.1@1136.17,2769 1183.17,2816 1489.17,2816 CD4070.5@1536.17,2769 ; CD4070.1@1136.17,2793.5 ccw(c1136.17,2852.65) 1178,2810.82 ccw(c1219.82,2769) CD4070.1@1160.67,2769 ; CD4070.5@1511.67,2769 ccw(c1452.53,2769) 1494.35,2810.82 ccw(c1536.17,2852.65) 1536.17,2793.5 ccw(c1536.17,2852.65) 1578,2810.82 ccw(c1619.82,2769) CD4070.5@1560.67,2769 ; 10k_2_.1@1514.45,2861.45 cw(c1491.41,2838.41) 1524,2838.41 cw(c1556.59,2838.41) 10k_2_.1@1533.55,2861.45 ; CD4070.5@1522.14,2789.09 ccw(c1503.35,2816) 1536.17,2816 ; 10k_2_.1@1524,2876 1524,2828.17 1536.17,2816 ; CD4070.5@1550.2,2789.09 cw(c1569,2816) 1536.17,2816 ; 4018_DIR.1@3346.97,2826 ccw(c3291.38,2826) 3330.69,2865.31 ccw(c3370,2904.62) 4018_DIR.1@3370,2849.03 ; 4018_DIR.1@3370,2826 3270,2926 2702,2926 2680.5,2947.5 1714.67,2947.5 CD4070.5@1536.17,2769 ; CD4070.5@1536.17,2769 1536.17,2816